# Altium PCB MS1-E18_Temperature_1.0.0.PcbDoc
Units mm, origin at the board's own origin, x right, y up, seen from the top; angles counter-clockwise.
Board outline 45 x 43 mm, 2 copper layers (L1, L4), stack 1.472 mm thick; 14 components, 17 nets, 77 pads, 11 vias.
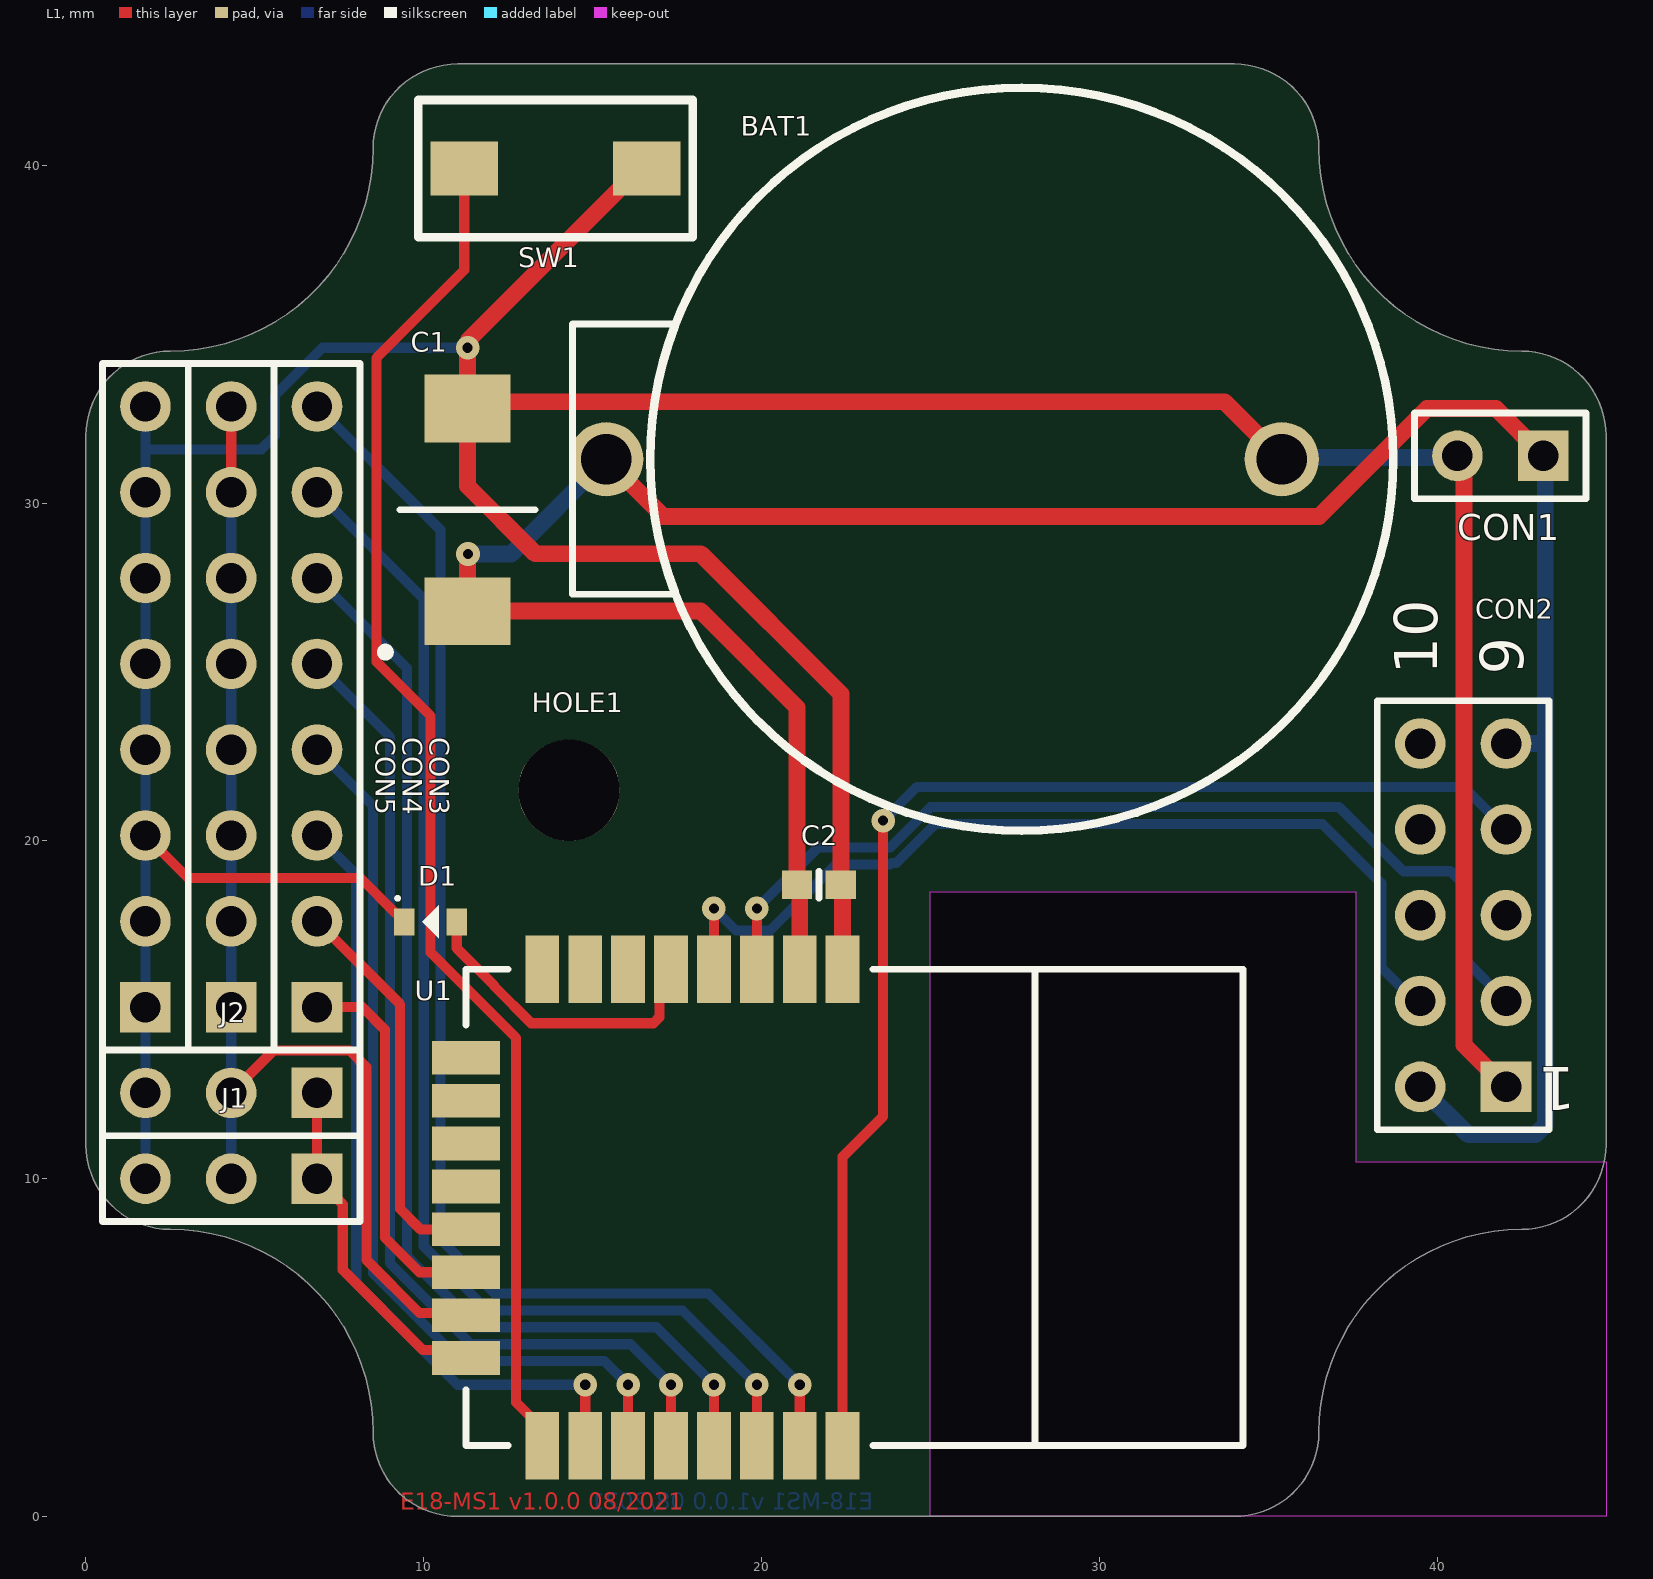
[diagram p0: L1 view]
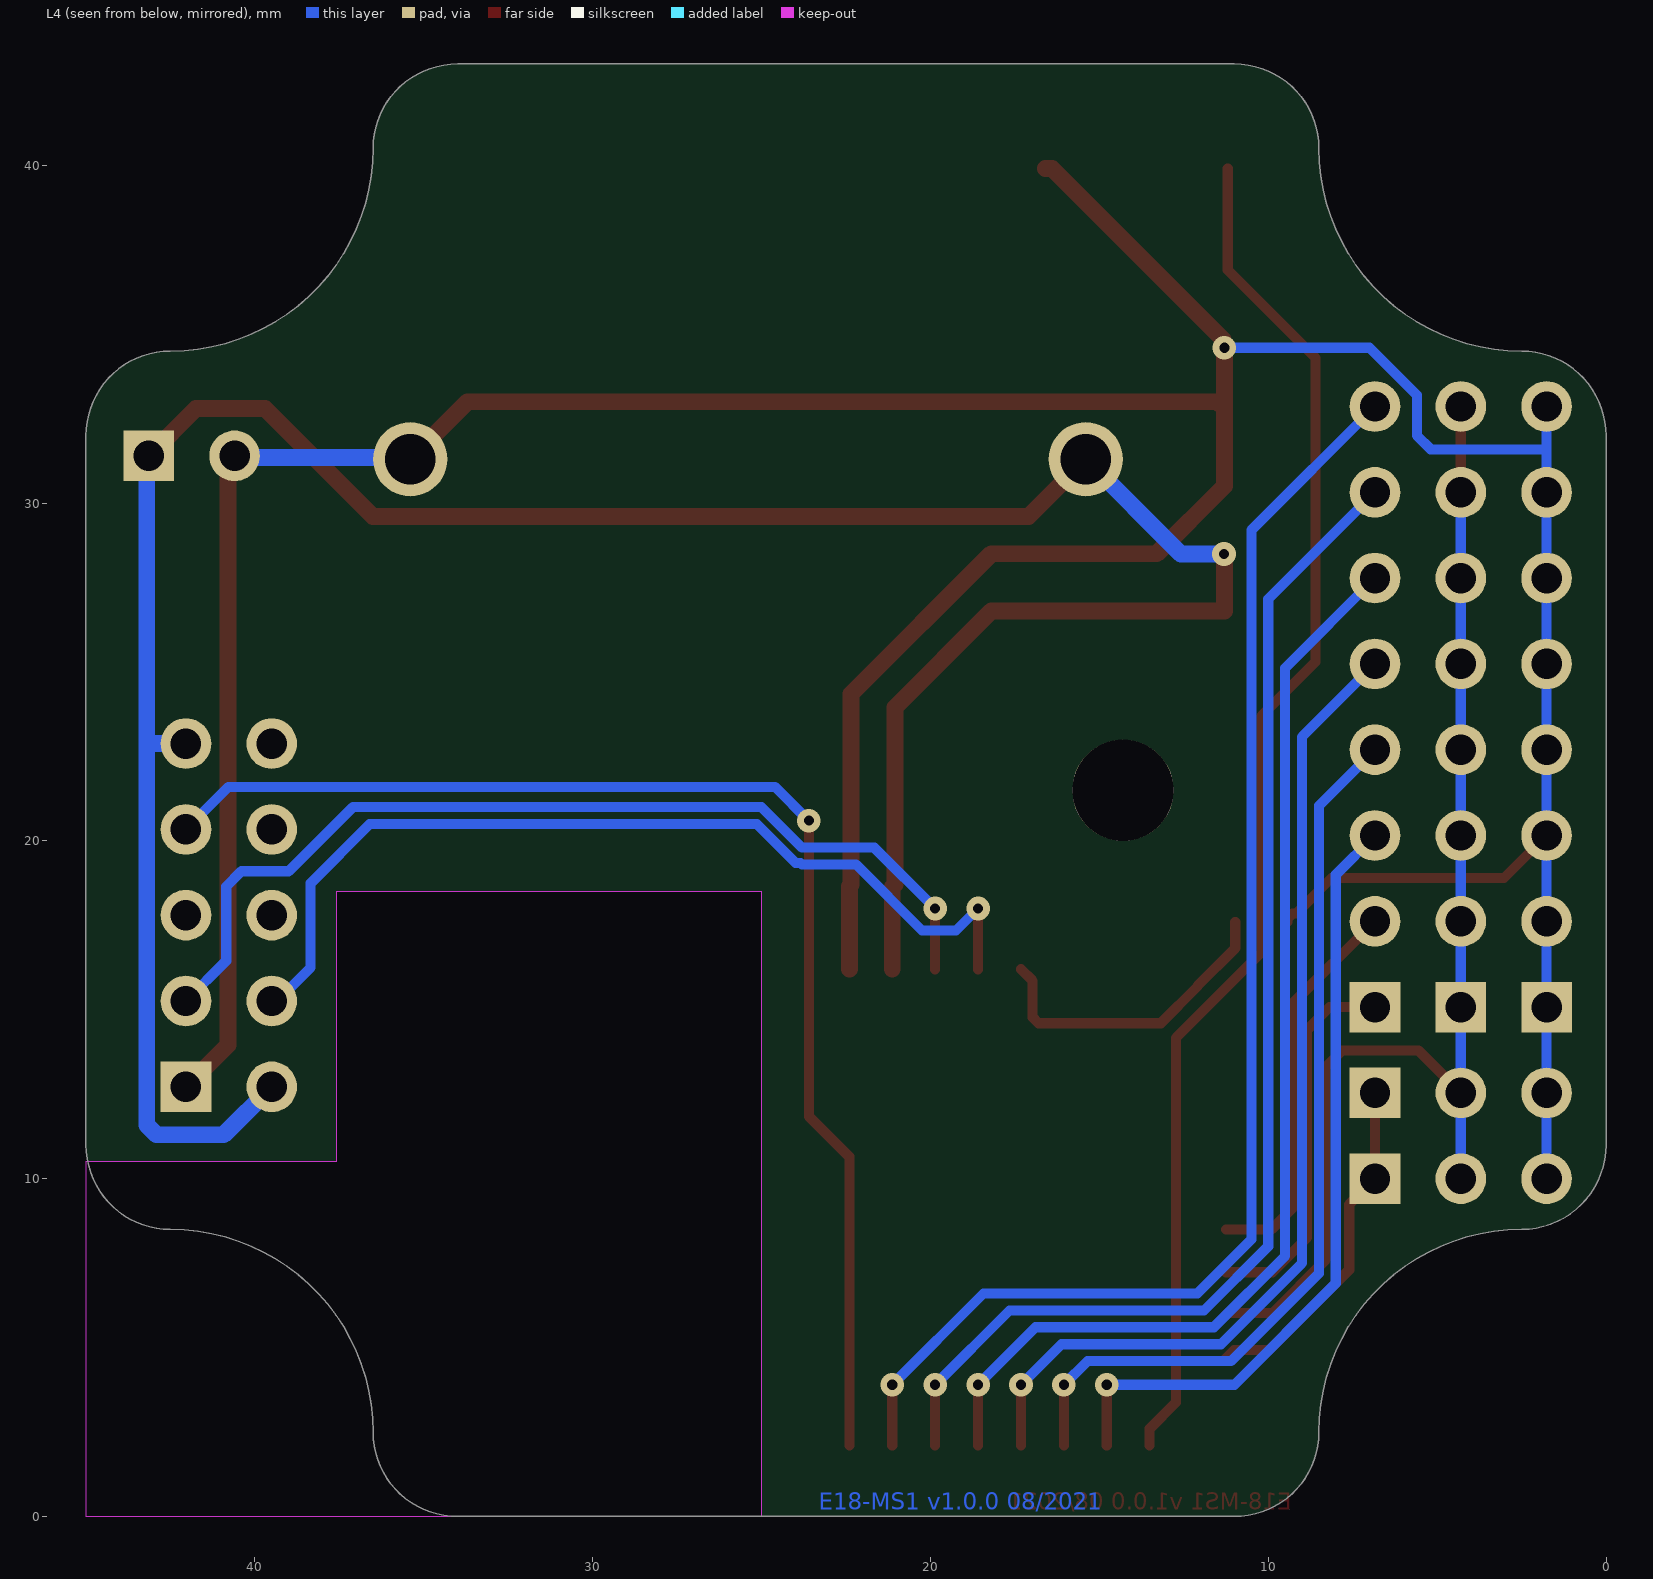
[diagram p1: L4 view, seen from below]
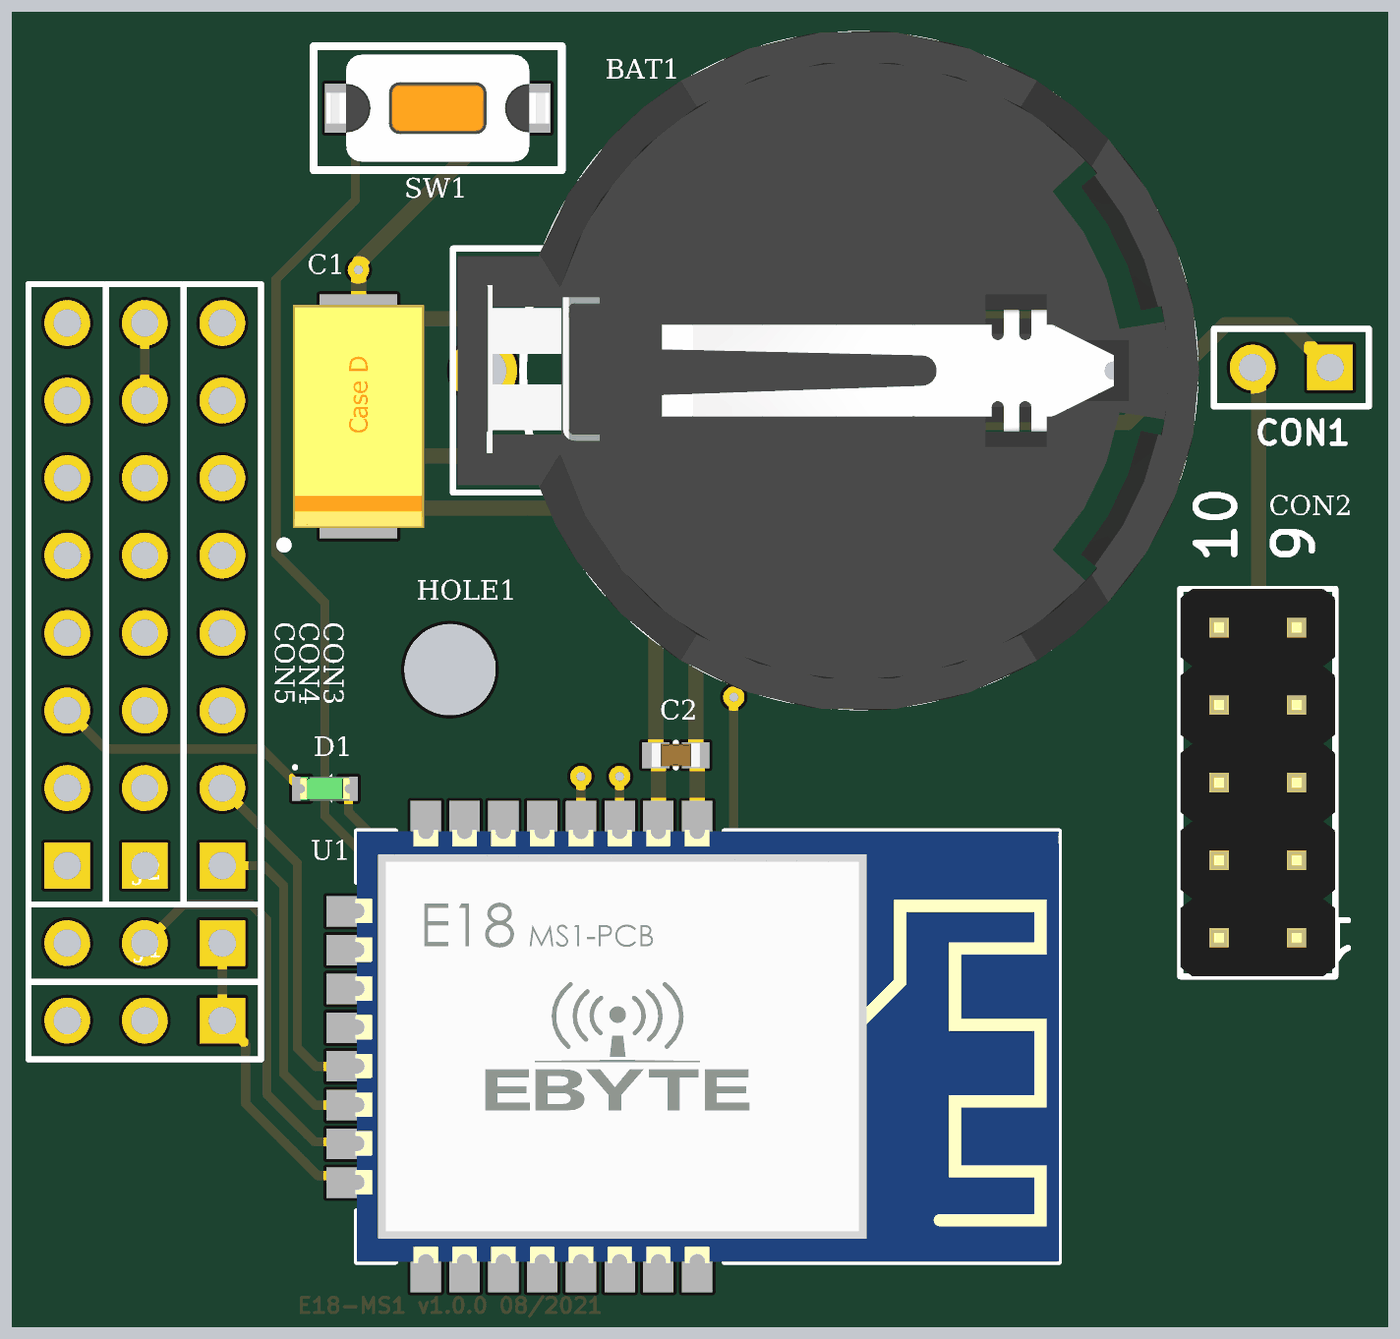
[diagram p2: 3D render of the assembled board from above, using the file's embedded part models]

## Layer stack, top to bottom
Top Solder: solder mask 0.02, Solder Resist, Dk 3.5
L1: signal copper 0.036
Dielectric 1: core 1.4, IS400, Dk 4.2
L4: signal copper 0.036
Bottom Solder: solder mask 0.02, Solder Resist, Dk 3.5

## Board outline
11,0 cw(c11,2.5) 8.5,2.5 ccw(c2.5,2.5) 2.5,8.5 cw(c2.5,11) 0,11 0,21.5 0,32 cw(c2.5,32) 2.5,34.5 ccw(c2.5,40.5) 8.5,40.5 cw(c11,40.5) 11,43 22.5,43 34,43 cw(c34,40.5) 36.5,40.5 ccw(c42.5,40.5) 42.5,34.5 cw(c42.5,32) 45,32 45,21.5 45,11 cw(c42.5,11) 42.5,8.5 ccw(c42.5,2.5) 36.5,2.5 cw(c34,2.5) 34,0
cut-out: 25,0 25,18.5 37.584,18.5 37.584,10.498 45,10.502 45,0

## Design rules (kind name [scope] priority, off if disabled: settings)
AssemblyTestPointUsage SilkToBoardRegionClearance_1 [All] p2:
AssemblyTestPointUsage SilkToBoardRegionClearance_2 [All] p3:
Clearance [All] p1: gap=0.152 ignorepadtopadclearanceinfootprint=FALSE except(0: Arc-Hole Track-Hole SMDPad-Hole THPad-Hole Via-Hole Fill-Hole Poly-Hole Region-Hole Text-Hole; 0.203: Poly-Poly)
ComponentClearance ComponentClearance_Screw_Enclosure [(ObjectKind = '3D Body') And (Identifier = 'cross_recessed_phillips_pan_head_M3x04') vs (ObjectKind = '3D Body') And (Identifier = 'Enclorsure g362_g250 - Bottom')] p1: gap=0.254 collisioncheckmode=3 verticalgap=0 showdistances=FALSE
ComponentClearance ComponentClearance_Battery [All vs InComponent('BT1')] p2: gap=0 collisioncheckmode=3 verticalgap=0 showdistances=FALSE
ComponentClearance [All] p3: gap=0.254 collisioncheckmode=3 verticalgap=0.254 showdistances=FALSE
HoleSize [All] p1: absolutevalues=TRUE maxlimit=6.35 minlimit=0.3 maxpercent=80.000 minpercent=20.000
MatchedLengths DiffPair_DIFF100MatchedLengths [InDifferentialPairClass('DIFF100')] p1: tolerance=0.152 checknetsindiffpair=TRUE checkdiffpairvsdiffpair=FALSE checkxsignals=FALSE checkothers=FALSE
MinimumSolderMaskSliver MinimumSolderMaskSliver_MS1 [HasFootprint('MS1-E18-PCB')] p1: minsoldermaskwidth=0.05
MinimumSolderMaskSliver [All] p2: minsoldermaskwidth=0.1
MinimumSolderMaskSliver SilkscreenOverComponentPads_2 [All] p3: minsoldermaskwidth=0.254
MinimumSolderMaskSliver SilkToSolderMaskClearance_1 [IsPad] p4: minsoldermaskwidth=0.254
MinimumSolderMaskSliver SilkscreenOverComponentPads_1 [All] p5: minsoldermaskwidth=0.254
MinimumSolderMaskSliver SilkToSolderMaskClearance [IsPad] p6: minsoldermaskwidth=0.254
MinimumSolderMaskSliver SilkscreenOverComponentPads [All] p7: minsoldermaskwidth=0.254
PolygonConnect [All] p1: connectstyle=Direct reliefconductorwidth=0.254 reliefentries=4 polygonreliefangle="90 Angle" airgapwidth=0.254
RoutingVias [All] p1: holewidth=0.3 width=0.7 viastyle="Through Hole" minholewidth=0.3 minwidth=0.65 maxholewidth=1 maxwidth=1.27
SilkToSolderMaskClearance SilkToSolderMaskClearance_2 [IsPad] p1: minsilkscreentomaskgap=0.254 clearancetoexposedcopper=TRUE
SolderMaskExpansion SolderMaskExpansion_Via [IsVia] p1: expansion=0.01 istentingtop=FALSE soldermaskfromhole=TRUE
SolderMaskExpansion [All] p2: expansion=0.102 istentingtop=FALSE
Width [All] p1: maxlimit=2.54 minlimit=0.152 preferedwidth=0.254
26 further rules are at their usual default settings.

## Components (designator, comment, footprint, x,y, rotation, side; value= is the part's Value field where it differs from the comment)
BAT1 "DS1092-04-B6P" DS1092-04-B6P 25.4,31.3 r180 top
C1 "68uF/16V" C-SMDD 11.3,29.8 r90 top
C2 "100nF/10V/5%/X7R" C-0603 21.7,18.7 r180 top
CON1 "PAD1G02" HDR1X02S 43.14,31.4 r180 top
CON2 "S2G10" HDR2X10 42.04,12.72 r90 top
CON3 "PAD1G08" HDR1X08S 6.84,15.08 r90 top
CON4 "PAD1G08" HDR1X08S 4.3,15.08 r90 top
CON5 "PAD1G08" HDR1X08S 1.76,15.08 r90 top
D1 "LED G" "LED-0603 GREEN" 10.2,17.6 r0 top
HOLE1 "Hole 3 NC" "Hole 3 NC" 14.3,21.5 r0 top locked
J1 "PAD1G03" HDR1X03S 6.84,10 r180 top
J2 "PAD1G03" HDR1X03S 6.84,12.54 r180 top
SW1 "DTSM31N" DTSM31N 13.9,39.9 r0 top
U1 "E18-MS1-PCB" MS1-E18-PCB 22.4,9.15 r90 top

## Footprints (in the part's own frame and the unit in brackets; to place one, negate y for a bottom-side part, rotate by r counter-clockwise, add the part's x,y. Pads: shape width x height; smd on the part's side, far side on the other; paste and mask are expansions set on the pad)
C-0603 [mm]
  rect 0.9x0.85 smd: 1(-0.65,0) 2(0.65,0)
  silkscreen extent 0,-0.4 0,0.4, body extent -0.8,-0.4 0.8,0.4, height 0.8
C-SMDD [mm]
  rect 2x2.55 smd: 1(-3,0) 2(3,0)
  silkscreen extent -4.34,-2 0,2.56, body extent -3.65,-2.15 3.65,2.15, height 2.8
DS1092-04-B6P [mm] "DS1092-04-B6P battery holder"
  round 2.2 hole 1.5: 1(10,0) 2(-10,0)
  silkscreen extent -13.3,-11 11,11, body extent -13.45,-11.15 10.85,11.15, height 8.51
DTSM31N [mm] "SMT Tactile switch 6x3.5mm"
  rect 2x1.6 smd: 1(-2.7,0) 2(2.7,0)
  silkscreen extent -4.06,-2.03 4.06,2.03, body extent -3.65,-1.75 3.65,1.75, height 4.3
HDR1X02S [mm] "Connector; Header; 2 Position"
  rect 1.5x1.5 hole 0.9: 1(0,0)
  round 1.5 hole 0.9: 2(2.54,0)
  silkscreen extent -1.27,-1.27 3.81,1.27
HDR1X03S [mm] "Connector; Header; 3 Position"
  rect 1.5x1.5 hole 0.9: 1(0,0)
  round 1.5 hole 0.9: 2(2.54,0) 3(5.08,0)
  silkscreen extent -1.27,-1.27 6.35,1.27
HDR1X08S [mm] "Connector; Header; 8 Position"
  rect 1.5x1.5 hole 0.9: 1(0,0)
  round 1.5 hole 0.9: 2(2.54,0) 3(5.08,0) 4(7.62,0) 5(10.16,0) 6(12.7,0) 7(15.24,0) 8(17.78,0)
  silkscreen extent -1.27,-1.27 19.05,1.27
HDR2X10 [mm] "Connector; Header; 5x2 Position"
  rect 1.5x1.5 hole 0.9: 1(0,0)
  round 1.5 hole 0.9: 2(0,2.54) 3(2.54,0) 4(2.54,2.54) 5(5.08,0) 6(5.08,2.54) 7(7.62,0) 8(7.62,2.54) 9(10.16,0) 10(10.16,2.54)
  silkscreen extent -1.27,-1.27 11.43,3.81, body extent -1.27,-1.27 11.43,3.81, height 8.51
"Hole 3 NC" [mm]
  round 3 hole 3 unplated: 0(0,0)
"LED-0603 GREEN" [mm] "SODFL, 2-Leads, Body 0,80x1,65mm, IPC Medium Density"
  rect 0.6x0.8 smd: 1(-0.775,0) 2(0.775,0)
  silkscreen extent -1.02,-0.48 0.25,0.75, body extent -0.81,-0.4 0.81,0.4, height 0.6
MS1-E18-PCB [mm] "MS1-E18-PCB module"
  rect 2x1 smd: 1(7.05,0) 2(7.05,1.27) 3(7.05,2.54) 4(7.05,3.81) 5(7.05,5.08) 6(7.05,6.35) 7(7.05,7.62) 8(7.05,8.89) 17(-7.05,8.89) 18(-7.05,7.62) 19(-7.05,6.35) 20(-7.05,5.08) 21(-7.05,3.81) 22(-7.05,2.54) 23(-7.05,1.27) 24(-7.05,0)
  rect 1x2 smd: 9(4.43,11.15) 10(3.16,11.15) 11(1.89,11.15) 12(0.62,11.15) 13(-0.65,11.15) 14(-1.92,11.15) 15(-3.19,11.15) 16(-4.46,11.15)
  silkscreen extent -7.05,-11.85 7.05,11.15, body extent -7.1,-11.85 7.1,11.2, height 2.51

## Part data
C1: library part CMP-034-0078-5, "SMD Tantalum Capacitor SMDD 68uF/16V", Capacitance=68uF, Case/Package=SMDD, Voltage=16V, IFS Description prefix="CAP-SMDD 68uF/16V", IFS PN=100108
C2: library part CMP-001-00101-1, "SMD Ceramic Capacitor 0603 100nF/10V/5%/X7R", Capacitance=100nF, Case/Package=0603, Dielectric=X7R, Tolerance=5%, Voltage=10V, IFS Description prefix="CAP-0603 4.7uF/10V/10%/X5R", IFS PN=102686
CON1: library part CMP-051-0005-3, "1x2pin single row pads, 2.54mm", IFS Description prefix=CON-PAD1G02
CON2: library part CMP-002-00023-1, "2x5pin dual row header, 2.54mm", IFS Description prefix=CON-S2G10
CON3 CON4 CON5: library part CMP-051-0045-3, "1x8pin single row pads, 2.54mm", IFS Description prefix=CON-PAD1G08
D1: library part CMP-056-0009-6, "LED; SMD; 0603; zelená; 4-15mcd; 1,6x0,8x1,1mm; 120°; 2,2÷2,5V; 20mA", Case/Package=LED-0603, IFS Description prefix=DIO-KP-1608SGC, IFS PN=114766
HOLE1: library part CMP-065-0000-4, "Hole 3mm Unconnected"
J1 J2: library part CMP-051-0077-3, "3 pin jumper", IFS Description prefix=CON-PAD1G03
SW1: library part CMP-067-0003-3, "SMT tactile switch, 2 pin", HelpURL=http://www.tme.eu/cz/Document/d1cb889bed37184cf06c8c8c7295a613/DTS-3,%20DTSML_L_-3-V.pdf, IFS Description prefix=SWI-DTSM31N, IFS PN=100177

## Via types
v1: diameter 0.7, hole 0.3, L1 to L4, 11 vias

## Nets (pads, with @x,y where several pads share a name; then routed paths per layer and width w, separated by ;. In a path a pad name is that pad's centre, name@x,y a point inside that pad or via, vN(x,y) a via of type N, cw(c..) or ccw(c..) an arc to the next point about the centre after c; other vN are vias at no path point)
DC: CON2.3 U1.3 | length 28.9
  L1 w0.3: U1.3 v1(19.86,18)
  L4 w0.3: v1(19.86,18) 21.66,19.8 23.8,19.8 25,21 37.1,21 39,19.1 40.4,19.1 40.848,18.652 40.848,16.452 CON2.3
DD: CON2.4 U1.4 | length 27.9
  L1 w0.3: U1.4 v1(18.59,18)
  L4 w0.3: v1(18.59,18) 19.242,17.348 20.248,17.348 22.2,19.3 23.8,19.3 23.848,19.348 23.987,19.348 25.14,20.5 36.6,20.5 38.35,18.75 38.35,16.25 39.34,15.26 CON2.4
DS18B20: J1.1 J2.1 U1.16 | length 10.3
  L1 w0.3: J2.1 J1.1 7.6,9.24 7.6,7.3 9.976,4.924 11.016,4.924 U1.16
EXT_PWR: CON4.1 CON4.2 CON4.3 CON4.4 CON4.5 CON4.6 CON4.7 CON4.8 J1.2 J2.2 U1.15 | length 36.9
  L1 w0.3: J2.2 5.56,13.8 7.8,13.8 8.3,13.3 8.3,7.6 9.876,6.024 11.186,6.024 U1.15 ; CON4.7 CON4.8
  L4 w0.3: J1.2 J2.2 CON4.1 CON4.2 CON4.3 CON4.4 CON4.5 CON4.6 CON4.7
GND: BAT1.2 C1.2 C2.1 CON1.2 CON2.1 CON5.1 CON5.2 CON5.3 CON5.4 CON5.5 CON5.6 CON5.7 CON5.8 D1.1 J1.3 J2.3 SW1.2 U1.1 | length 125.9
  L1 w0.3: CON5.3 3.02,18.9 8.125,18.9 9.175,17.85 9.275,17.85 9.425,17.7 D1.1
  L1 w0.5: SW1.2 16.4,39.9 11.338,34.838 11.338,34.638 v1(11.3,34.6) 11.3,33 C1.2 ; U1.1 22.4,18.65 C2.1 22.35,24.35 18.2,28.5 13.3,28.5 11.3,30.5 C1.2 ; BAT1.2@35.45,31.35 BAT1.2 33.7,33 11.5,33 C1.2 ; CON1.2 40.791,31.209 40.791,30.616 40.8,30.607 40.8,13.96 CON2.1
  L4 w0.3: J1.3 J2.3 CON5.1 CON5.2 CON5.3 CON5.4 CON5.5 CON5.6 CON5.7 1.76,31.59 ; CON5.8 1.76,31.59 ; v1(11.3,34.6) 7,34.6 5.6,33.2 5.6,32 5.19,31.59 1.76,31.59
  L4 w0.5: BAT1.2@35.45,31.35 CON1.2@40.55,31.35
LED: D1.2 U1.5 | length 9.3
  L1 w0.3: D1.2 10.975,16.825 12.092,15.708 12.092,15.69 13.182,14.6 16.8,14.6 16.976,14.776 16.976,15.856 U1.5
P0.0: CON3.8 U1.23 | length 40.4
  L1 w0.3: U1.23 v1(21.13,3.9)
  L4 w0.3: CON3.8 10.5,29.2 10.5,8.2 12.1,6.6 18.43,6.6 v1(21.13,3.9)
P0.1: CON3.7 U1.22 | length 37
  L1 w0.3: U1.22 v1(19.86,3.9)
  L4 w0.3: CON3.7 10,27.16 10,8 11.9,6.1 17.66,6.1 v1(19.86,3.9)
P0.2: CON3.6 U1.21 | length 33.6
  L1 w0.3: U1.21 v1(18.59,3.9)
  L4 w0.3: CON3.6 9.5,25.12 9.5,7.71 11.61,5.6 16.89,5.6 v1(18.59,3.9)
P0.3: CON3.5 U1.20 | length 30.2
  L1 w0.3: U1.20 v1(17.32,3.9)
  L4 w0.3: CON3.5 9,23.08 9,7.5 11.4,5.1 16.12,5.1 v1(17.32,3.9)
P0.4: CON3.4 U1.19 | length 26.9
  L1 w0.3: U1.19 v1(16.05,3.9)
  L4 w0.3: CON3.4 8.5,21.04 8.5,7.2 11.1,4.6 15.35,4.6 v1(16.05,3.9)
P0.5: CON3.3 U1.18 | length 23.6
  L1 w0.3: U1.18 v1(14.78,3.9)
  L4 w0.3: CON3.3 8,19 8,6.9 11,3.9 v1(14.78,3.9)
P1.1: CON3.1 U1.14 | length 11.3
  L1 w0.3: CON3.1 8.18,15.08 8.848,14.412 8.848,8.258 9.876,7.23 U1.14
P1.2: CON3.2 U1.13 | length 11.7
  L1 w0.3: CON3.2 9.3,15.16 9.3,9.1 9.9,8.5 U1.13
RST: CON2.7 U1.24 | length 38.4
  L1 w0.3: U1.24 22.4,10.65 23.6,11.85 v1(23.6,20.6)
  L4 w0.3: v1(23.6,20.6) 24.6,21.6 40.78,21.6 CON2.7
VCC_BAT: BAT1.1 C1.1 C2.2 CON1.1 CON2.2 CON2.9 U1.2 | length 81.3
  L1 w0.5: v1(11.312,28.491) 11.3,28.48 C1.1 18.2,26.8 21.05,23.95 C2.2 ; BAT1.1 17.1,29.6 36.5,29.6 39.7,32.8 41.74,32.8 CON1.1 ; U1.2 C2.2@21.13,18.631
  L4 w0.5: v1(11.312,28.491) 12.591,28.491 BAT1.1 ; CON2.2 40.92,11.3 42.907,11.3 43.2,11.593 43.2,22.88 ; CON2.9 43.2,22.88 ; CON1.1 43.2,31.34 43.2,22.88
WAKE: SW1.1 U1.17 | length 40.9
  L1 w0.3: SW1.1 11.2,36.9 8.6,34.3 8.6,25.3 10.2,23.7 10.2,16.7 12.73,14.17 12.73,3.38 13.51,2.6 U1.17
pads on no net: CON2.5 CON2.6 CON2.8 CON2.10 HOLE1.0 U1.6 U1.7 U1.8 U1.9 U1.10 U1.11 U1.12

## Other copper
L1:
  text "E18-MS1 v1.0.0 08/2021" at 9.3,0.2 h0.5
L4:
  text "E18-MS1 v1.0.0 08/2021" at 23.3,0.2 h0.5

## Silkscreen, mask and mechanical layers (free items; w line width, h text height)
Board:
  lines w0.1: 34.246,0 34.246,0 ; 34.246,0 34,0 34.246,0 ; 0,10.754 0,11 0,21.5 0,32 0,32.246 0.096,32.729 0.285,33.184 0.558,33.594 0.906,33.942 1.316,34.215 1.771,34.404 2.254,34.5 2.5,34.5 2.794,34.507 3.38,34.565 3.958,34.68 4.521,34.851 5.065,35.076 5.585,35.354 6.074,35.681 6.529,36.054 6.946,36.471 7.319,36.926 7.646,37.415 7.924,37.935 8.149,38.479 8.32,39.042 8.435,39.62 8.493,40.206 8.5,40.5 8.5,40.746 8.596,41.229 8.785,41.684 9.058,42.094 9.406,42.442 9.816,42.715 10.271,42.904 10.754,43 11,43 22.5,43 34,43 34.246,43 34.729,42.904 35.184,42.715 35.594,42.442 35.942,42.094 36.215,41.684 36.404,41.229 36.5,40.746 36.5,40.5 36.507,40.206 36.565,39.62 36.68,39.042 36.851,38.479 37.076,37.935 37.354,37.415 37.681,36.926 38.054,36.471 38.471,36.054 38.926,35.681 39.415,35.354 39.935,35.076 40.479,34.851 41.042,34.68 41.62,34.565 42.206,34.507 42.5,34.5 42.746,34.5 43.229,34.404 43.684,34.215 44.094,33.942 44.442,33.594 44.715,33.184 44.904,32.729 45,32.246 45,32 45,21.5 45,11 45,10.754 44.95,10.502 37.584,10.498 37.584,18.5 25,18.5 25,0 11,0 10.754,0 10.271,0.096 9.816,0.285 9.406,0.558 9.058,0.906 8.785,1.316 8.596,1.771 8.5,2.254 8.5,2.5 8.493,2.794 8.435,3.38 8.32,3.958 8.149,4.521 7.924,5.065 7.646,5.585 7.319,6.074 6.946,6.529 6.529,6.946 6.074,7.319 5.585,7.646 5.065,7.924 4.521,8.149 3.958,8.32 3.38,8.435 2.794,8.493 2.5,8.5 2.254,8.5 1.771,8.596 1.316,8.785 0.906,9.058 0.558,9.406 0.285,9.816 0.096,10.271 0,10.754

## Text inside footprints (layer, text, board x,y; h text height)
CON2: Top Overlay "1" at 44.1,13.3 h1.27 r180; Top Overlay "9" at 42.548,24.912 h1.27 r90; Top Overlay "10" at 40.008,24.912 h1.27 r90